# Altium PCB Filter_Layout.PcbDoc
Units mil, origin at the board's own origin, x right, y up, seen from the top; angles counter-clockwise.
Board outline 600 x 700 mil, 2 copper layers (Top Layer, Bottom Layer); 5 components, 6 nets, 18 pads, 1 vias.
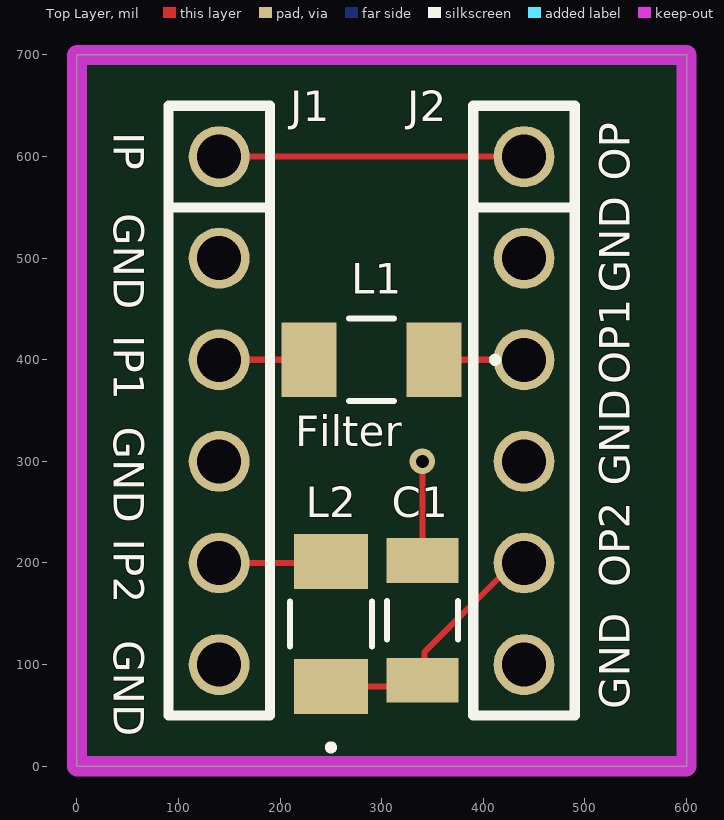
[diagram p0: Top Layer view]
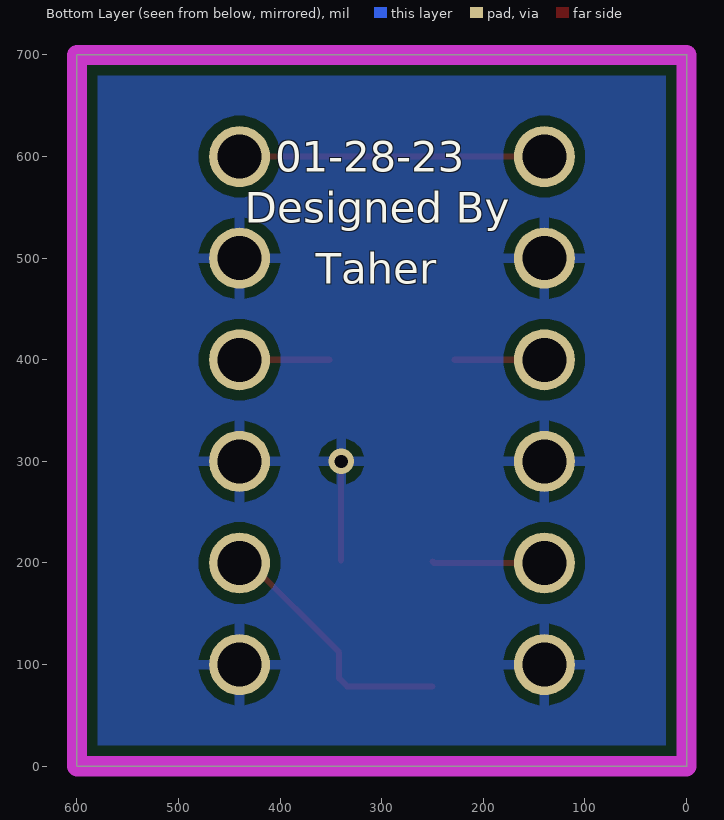
[diagram p1: Bottom Layer view, seen from below]
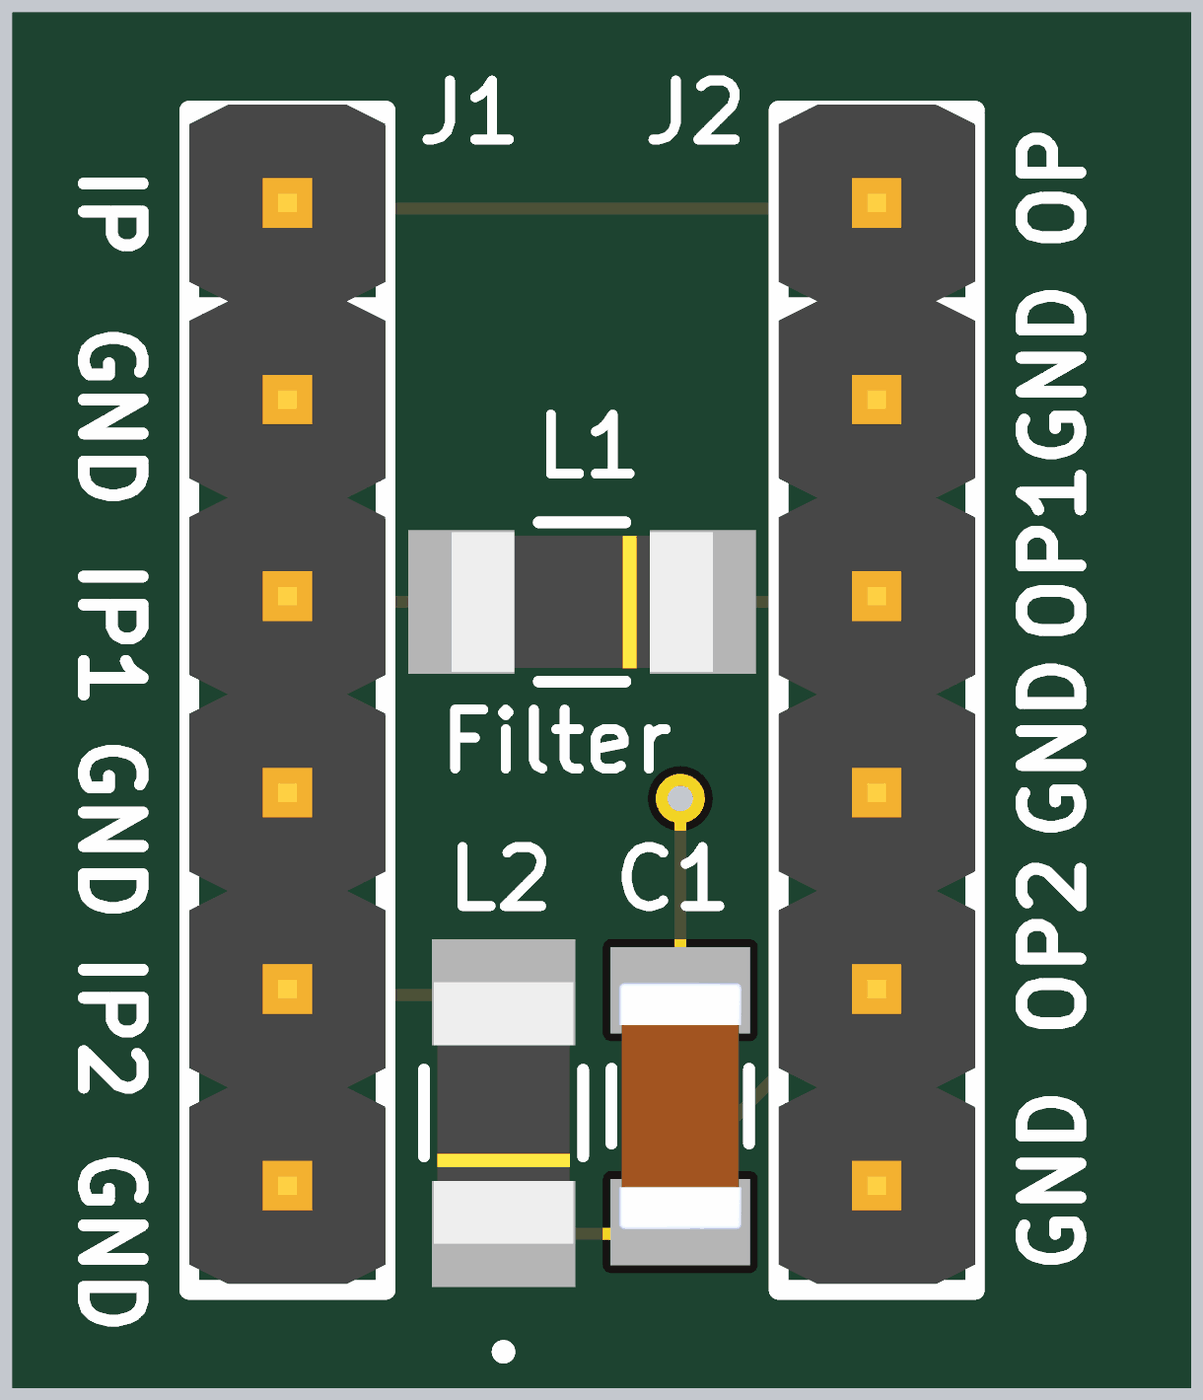
[diagram p2: 3D render of the assembled board from above, using the file's embedded part models]

## Layer stack, top to bottom
Top Solder: solder mask 0.4, Solder Resist, Dk 3.5
Top Layer: signal copper 1.4
Dielectric 1: dielectric 12.6, FR-4, Dk 4.8
Bottom Layer: signal copper 1.4
Bottom Solder: solder mask 0.4, Solder Resist, Dk 3.5

## Board outline
0,0 600,0 600,700 0,700

## Design rules (kind name [scope] priority, off if disabled: settings)
Clearance [All] p1: gap=10 ignorepadtopadclearanceinfootprint=FALSE except(0: Arc-Hole Track-Hole SMDPad-Hole THPad-Hole Via-Hole Fill-Hole Poly-Hole Region-Hole Text-Hole)
PlaneClearance [All] p1: clearance=10
PolygonConnect [All] p1: connectstyle=Relief reliefconductorwidth=10 reliefentries=4 polygonreliefangle="90 Angle" airgapwidth=10
RoutingVias [All] p1: holewidth=13 width=25 viastyle="Through Hole" minholewidth=13 minwidth=25 maxholewidth=28 maxwidth=80
SolderMaskExpansion [All] p1: expansion=4 istentingtop=FALSE
UnRoutedNet [All] p1: checkbadconnections=TRUE
Width [All] p1: maxlimit=10 minlimit=6 preferedwidth=6
28 further rules are at their usual default settings.

## Components (designator, comment, footprint, x,y, rotation, side; value= is the part's Value field where it differs from the comment)
C1 "22uF" 1206_Passive_Capacitor 340,143.5 r270 top
J1 "MALE" 6_PIN_100MIL-Male 140,600 r270 top
J2 "MALE" 6_PIN_100MIL-Male 440,600 r270 top
L1 "FB_10uH_1206" AIML-1206_ABR-M 290,400 r180 top
L2 "FB_10uH_1206" AIML-1206_ABR-M 250,140 r90 top

## Footprints (in the part's own frame and the unit in brackets; to place one, negate y for a bottom-side part, rotate by r counter-clockwise, add the part's x,y. Pads: shape width x height; smd on the part's side, far side on the other; paste and mask are expansions set on the pad)
6_PIN_100MIL-Male [mil]
  round 60 hole 43.31: 1(0,0) 2(100,0) 3(200,0) 4(300,0) 5(400,0) 6(500,0)
  silkscreen extent -50,-50 550,50, body extent -53,-50 547,50, height 337
1206_Passive_Capacitor [mil]
  rect 44x71 smd: 1(-59,0) 2(59,0)
  silkscreen extent -19,-35 19,35, body extent -63,-31 63,32, height 50
AIML-1206_ABR-M [mil]
  rect 54x73 smd paste+0 mask+0: 1(-61.5,0) 2(61.5,0)
  silkscreen extent -124,-40 22,40, body extent -66,-36 66,36, height 55

## Part data
C1: library part C_22uF_1206, "22uF ±10% 25V X5R 1206 Multilayer Ceramic Capacitors MLCC - SMD/SMT RoHS", LCSC Part#=C12891, MFR Part #=CL31A226KAHNNNE, Datasheet=https://datasheet.lcsc.com/lcsc/1811031514_Samsung-Electro-Mechanics-CL31A226KAHNNNE_C12891.pdf, Type=basic
J1 J2: library part JM_6_PIN_MALE, "Male header- 6 pin 1 row- through Hole", LCSC Part#=C37208, Datasheet=https://datasheet.lcsc.com/szlcsc/1810312320_BOOMELE-Boom-Precision-Elec-C37208_C37208.pdf, Type=Extended
L1 L2: "25mA 10uH ±10% 800mΩ 1206  Inductors (SMD) ROHS", LCSC Part#=C1051, MFR Part #=CMI321609X100KT, Mfr_Name="FH (Guangdong Fenghua Advanced Tech)", Datasheet=https://datasheet.lcsc.com/lcsc/1810311314_FH--Guangdong-Fenghua-Advanced-Tech-CMI321609X100KT_C1051.pdf, Type=Basic

## Via types
v1: diameter 25, hole 13, Top Layer to Bottom Layer, 1 vias

## Nets (pads, with @x,y where several pads share a name; then routed paths per layer and width w, separated by ;. In a path a pad name is that pad's centre, name@x,y a point inside that pad or via, vN(x,y) a via of type N, cw(c..) or ccw(c..) an arc to the next point about the centre after c; other vN are vias at no path point)
FIL_1: J1.5 L2.2 | length 110.6
  Top Layer w6: J1.5 248.5,200 L2.2
FIL_2: C1.2 J2.5 L2.1 | length 255.3
  Top Layer w6: L2.1 334,78.5 341.99,86.49 341.99,111.99 430,200 J2.5
GND: C1.1 J1.2 J1.4 J1.6 J2.2 J2.4 J2.6 | length 97.5
  Top Layer w6: C1.1 v1(340,300)
IND1: J1.3 L1.2 | length 88.5
  Top Layer w6: J1.3 L1.2
IND2: J2.3 L1.1 | length 88.5
  Top Layer w6: L1.1 J2.3
IO: J1.1 J2.1 | length 300
  Top Layer w6: J1.1 J2.1

## Polygon pours and split planes (outlines as drawn)
GND on Bottom Layer "GND_L02_P000" (solid, pour order 0): 0,0 600,0 600,700 0,700

## Keep-outs
Keep-Out Layer:
  the board outline again, w20

## Silkscreen, mask and mechanical layers (free items; w line width, h text height)
Top Overlay:
  text "IP" at 36,624 h30 r270
  text "OP" at 544,576 h30 r90
  text "GND" at 36,544 h30 r270
  text "GND" at 544,466 h30 r90
  text "IP1" at 36,424 h30 r270
  text "OP1" at 544,376 h30 r90
  text "GND" at 36,334 h30 r270
  text "Filter" at 215,315 h30
  text "GND" at 544,276 h30 r90
  text "IP2" at 36,224 h30 r270
  text "OP2" at 544,176 h30 r90
  text "GND" at 36,124 h30 r270
  text "GND" at 544,56 h30 r90
Bottom Overlay:
  text "01-28-23" at 405,585 h30
  text "Designed By" at 435,535 h30
  text "Taher" at 365,475 h30